# EAGLE board OOK48_Interface (EAGLE 7.7.0)
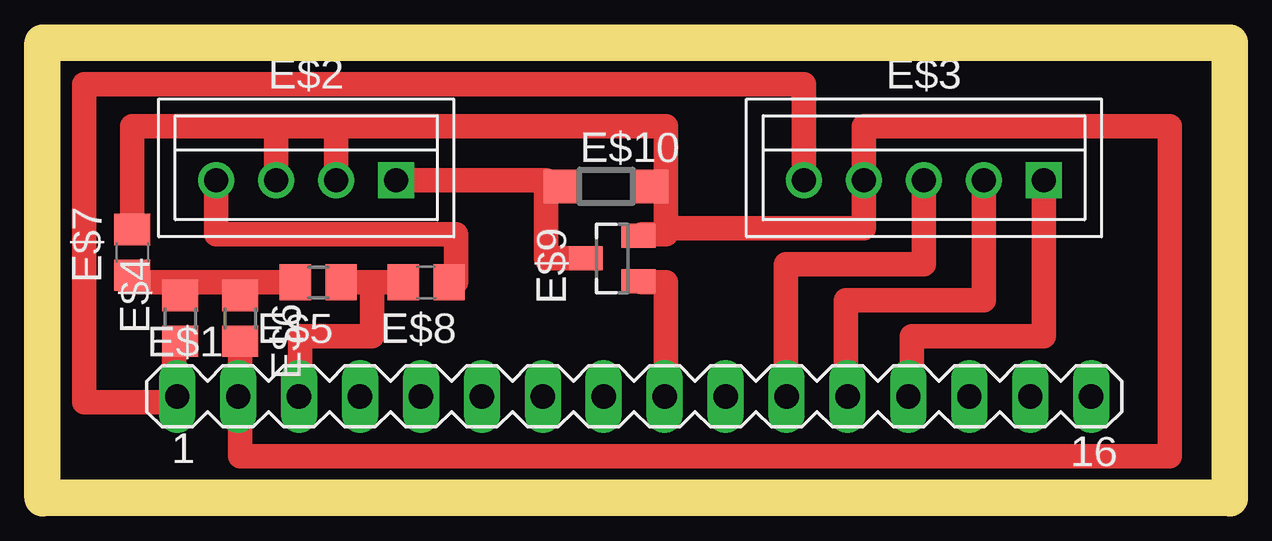
[diagram p0: board, top side]

Size 48 x 17.5 mm. Coordinates in mm from the lower left corner, seen from the top.
Outline: 0,0 0,17.5 48,17.5 48,0 0,0
Copper layers (1*16): Top 0.035mm / dielectric 1.5mm / Bottom 0.035mm
Design rules "default": minimum track width 10mil, minimum drill 24mil, track to track 8mil, track to pad 8mil, pad to pad 8mil, via to via 8mil, smd to smd 8mil, copper to edge 40mil, drill to drill 8mil, minimum pad ring 10mil, minimum via ring 8mil, stop-mask expansion 4mil, vias tented up to drill 0mil, thermal gap 10mil
Milling: 4 lines

## Footprints (pad centres in the part's own frame; a part is rotated, then mirrored left to right if it is on the bottom)
MA16-1 = drill 1.016 long: 1 -24.13,0; 2 -21.59,0; 3 -19.05,0; 4 -16.51,0; 5 -13.97,0; 6 -11.43,0; 7 -8.89,0; 8 -6.35,0; 9 -3.81,0; 10 -1.27,0; 11 1.27,0; 12 3.81,0; 13 6.35,0; 14 8.89,0; 15 11.43,0; 16 13.97,0
B4B-XH = drill 1 square: P$1 3.75,0 | drill 1: P$2 1.25,0; P$3 -1.25,0; P$4 -3.75,0
B5B-XH = drill 1 square: P$1 5,0 | drill 1: P$2 2.5,0; P$3 0,0; P$4 -2.5,0; P$5 -5,0
R0805 = smd 1.3 x 1.5: 1 -0.95,0; 2 0.95,0
C0805 = smd 1.3 x 1.5: 1 -0.95,0; 2 0.95,0
SOT23 = smd 1 x 1.4: 1 -0.95,-1.1; 2 0.95,-1.1; 3 0,1.1
SOD123 = smd 1.4 x 1.4: A 1.9,0; C -1.9,0

## Placement (x,y rotation side)
E$1  [MA16-1]  29,3.5 0 top
E$2  [B4B-XH]  10.25,12.5 0 top
E$3  [B5B-XH]  36,12.5 0 top
E$4  [R0805]  5,6.75 90 top
E$5  [R0805]  10.75,8.25 180 top
E$6  [R0805]  7.5,6.75 270 top
E$7  [C0805]  3,9.5 90 top
E$8  [C0805]  15.25,8.25 180 top
E$9  [SOT23]  23,9.25 90 top
E$10  [SOD123]  22.75,12.25 0 top

## Library data of the parts
E$1 = con-lstb
E$2 E$3 = bt_con-jst-xh
E$4-E$8 = eagle-ltspice
E$9 = linear
E$10 = diode

## Nets
S$2: E$3.P$2
S$3: E$3.P$3
S$4: E$3.P$4
S$11: E$2.P$2
S$15: E$3.P$5

## Tracks (layer width: path | path; a pad name or v marks a point on that pad's centre or on a via)
S$1
  Top 1.016: 40.75,12.5 41,12.5 41,6 35.5,6 35.5,3.5
S$2
  Top 1.016: E$3.P$2 38.5,7.5 32.75,7.5 32.75,3.25
S$3
  Top 1.016: E$3.P$3 36,9 30.25,9 30.25,3
S$4
  Top 1.016: 9,14.75 9,12.5 | 9,14.75 3,14.75 3,10.75 | 9,14.75 25.25,14.75 25.25,10.5 33.5,10.5 E$3.P$4 33.5,14.75 46.25,14.75 46.25,1 7.5,1 7.5,4.75
S$5
  Top 1.016: 24.25,8.25 25.25,8.25 25.25,3.25
S$6
  Top 1.016: 24.25,10.25 25.25,10.25 25.25,14.5
S$7
  Top 1.016: 14,12.5 20.25,12.5 20.25,9.25 22,9.25
S$8
  Top 1.016: 14,8.25 13,8.25 | 13,8.25 12,8.25 | 13,8.25 13,6 10,6 10,3.5
S$9
  Top 1.016: 9.5,8.25 7,8.25
S$10
  Top 1.016: 7.25,8.25 2.75,8.25
S$11
  Top 1.016: E$2.P$2 11.5,14.5
S$12
  Top 1.016: 7.5,3.5 7.5,5.5
S$13
  Top 1.016: 6.5,12.5 6.5,10.25 16.5,10.25 16.5,8.25
S$14
  Top 1.016: 4.75,3.5 4.75,5.75 5,5.75
S$15
  Top 1.016: 5,3.25 1,3.25 1,16.5 31,16.5 E$3.P$5